# EAGLE board Alice (EAGLE 7.4.0)
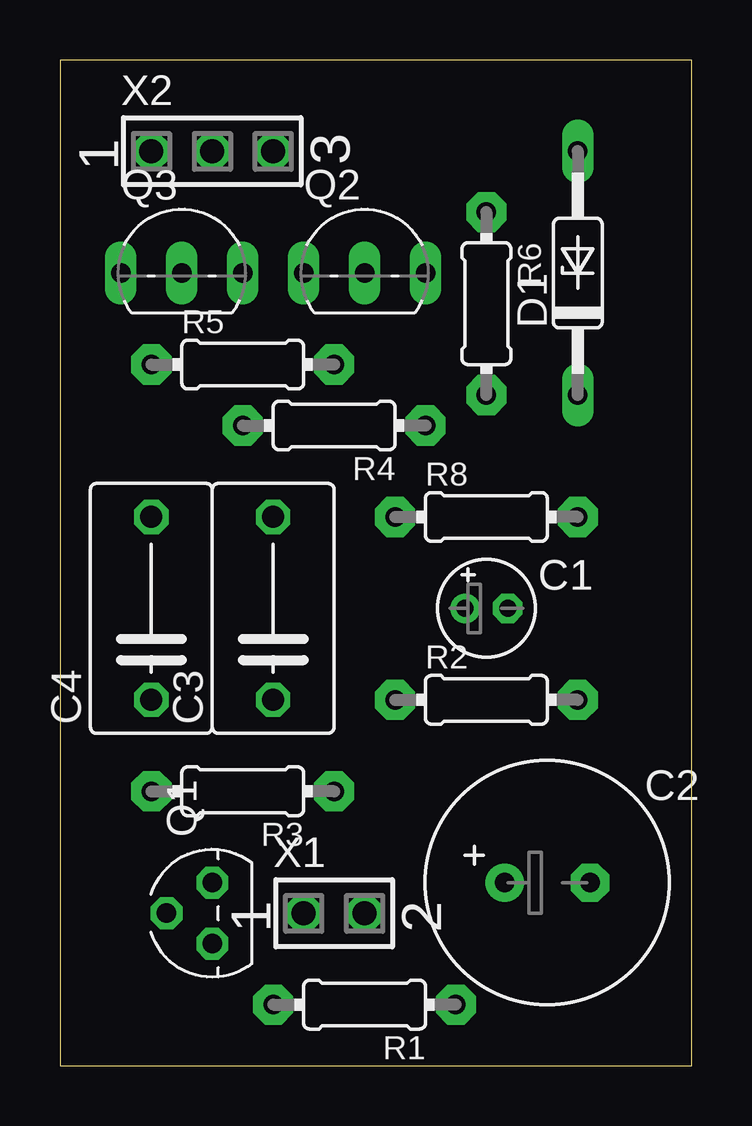
[diagram p0: board, top side]
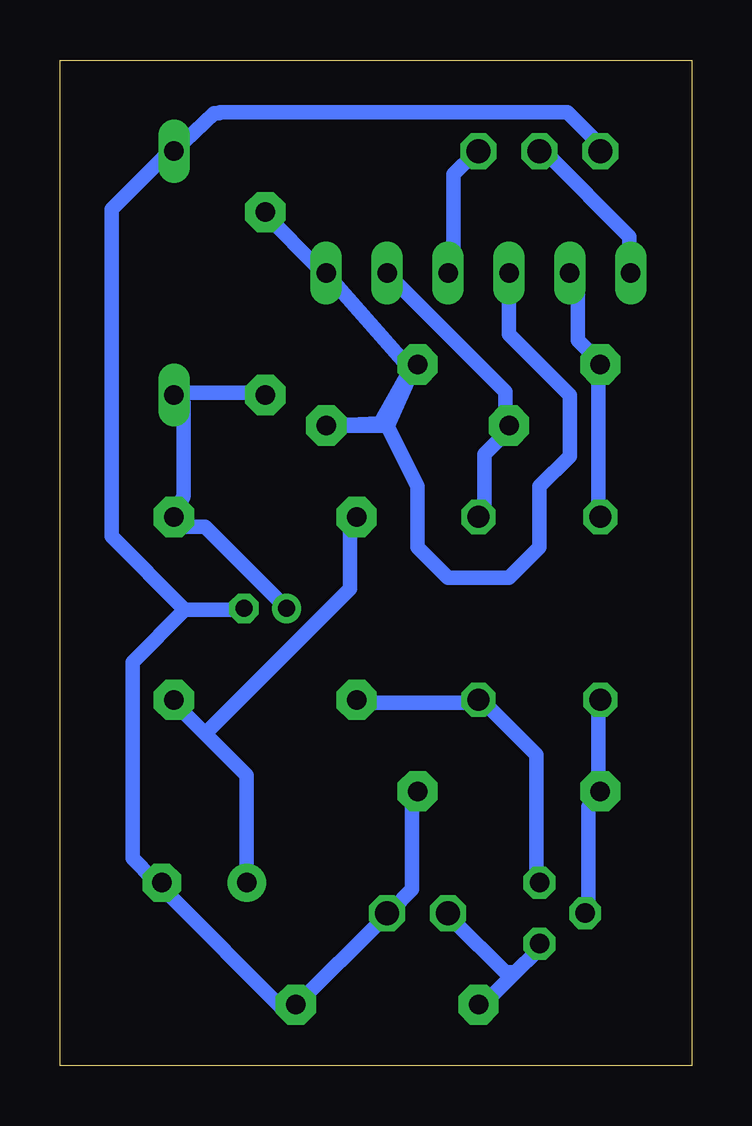
[diagram p1: board, bottom side, seen from below]

Size 26.34 x 41.9 mm. Coordinates in mm from the lower left corner, seen from the top.
Outline: 0,0 26.34,0 26.34,41.9 0,41.9 0,0
Copper layers (1*16): Top 0.035mm / dielectric 1.5mm / Bottom 0.035mm
Design rules "default": minimum track width 10mil, minimum drill 24mil, track to track 8mil, track to pad 8mil, pad to pad 8mil, via to via 8mil, smd to smd 8mil, copper to edge 40mil, drill to drill 8mil, minimum pad ring 10mil, minimum via ring 8mil, stop-mask expansion 4mil, vias tented up to drill 0mil, thermal gap 10mil
Net classes: 0 default: width 0.61 mm, drill 0.508 mm, clearance 0.254 mm

## Footprints (pad centres in the part's own frame; a part is rotated, then mirrored left to right if it is on the bottom)
E1,8-4 = drill 0.711 pad 1.168: + -0.889,0 | drill 0.711 pad 1.168 octagon: - 0.889,0
E3,5-10 = drill 0.813 pad 1.6: + -1.778,0 | drill 0.813 pad 1.6 octagon: - 1.778,0
C075-052X106 = drill 0.914 octagon: 1 -3.81,0; 2 3.81,0
DO35Z10 = drill 0.813 long: A 5.08,0; C -5.08,0
TO-92 = drill 0.813 octagon: 1 -1.27,0; 2 0,1.905; 3 1.27,0
TO92-EBC-OVAL = drill 0.813 long: B 0,-1.27; C 2.54,-1.27; E -2.54,-1.27
0204/7 = drill 0.813 pad 1.676 octagon: 1 -3.81,0; 2 3.81,0
SSW-101-02-S-D = drill 1 pad 1.5 octagon: 1 0,-1.27; 2 0,1.27
SSW-101-02-S-T = drill 1 pad 1.5 octagon: 1 0,-2.54; 2 0,0; 3 0,2.54

## Placement (x,y rotation side)
C1  10uF  [E1,8-4]  17.78,19.05 0 top
C2  68uF  [E3,5-10]  20.32,7.62 0 top
C3  .47uF  [C075-052X106]  8.89,19.05 90 top
C4  .47uF  [C075-052X106]  3.81,19.05 90 top
D1  12V Zener  [DO35Z10]  21.59,33.02 90 top
Q1  J305  [TO-92]  6.35,6.35 90 top
Q2  2N5087  [TO92-EBC-OVAL]  12.7,34.29 0 top
Q3  2N5087  [TO92-EBC-OVAL]  5.08,34.29 0 top
R1  1G  [0204/7]  12.7,2.54 180 top
R2  2K2  [0204/7]  17.78,15.24 0 top
R3  2K2  [0204/7]  7.62,11.43 180 top
R4  100K  [0204/7]  11.43,26.67 180 top
R5  100K  [0204/7]  7.62,29.21 0 top
R6  6K8  [0204/7]  17.78,31.75 270 top
R8  330  [0204/7]  17.78,22.86 0 top
X1  Mic  [SSW-101-02-S-D]  11.43,6.35 270 top
X2  XLR  [SSW-101-02-S-T]  6.35,38.1 270 top

## Library data of the parts
C1-C4 Q2 Q3 R1-R6 R8 = adafruit
D1 = diode
Q1 = transistor-fet
X1 = con-samtec; MPN: SSW-101-02-S-D; OC_FARNELL: unknown; OC_NEWARK: 82P1456
X2 = con-samtec; MPN: SSW-101-02-S-T; OC_FARNELL: unknown; OC_NEWARK: 82P1460

## Nets
N$1: C3.1 Q1.3 R2.1
N$2: Q2.E X2.3
N$3: C2.+ R2.2 R8.1
N$4: C4.1 Q1.2 R3.2
N$5: Q2.C Q3.C R4.1 R5.2 R6.1
N$6: C3.2 Q2.B R4.2
N$7: C4.2 Q3.B R5.1
N$8: Q1.1 R1.2 X1.1
N$9: C1.+ D1.C R6.2 R8.2
N$10: Q3.E X2.2
XLR-1: C1.- C2.- D1.A R1.1 R3.1 X1.2 X2.1

## Tracks (layer width: path | path; a pad name or v marks a point on that pad's centre or on a via)
N$1
  Bottom 0.61: Q1.3 6.48,7.77 6.48,12.95 8.64,15.11 C3.1 9.07,15.11 13.82,15.11 R2.1
N$2
  Bottom 0.61: Q2.E 9.93,33.25 9.93,37.13 9.07,38 X2.3
N$3
  Bottom 0.61: 20.3,13.82 21.59,15.11 R2.2 | 20.3,13.82 18.57,12.09 18.57,7.77 C2.+ | 20.3,13.82 14.25,19.86 14.25,22.45 R8.1
N$4
  Bottom 0.61: Q1.2 4.32,6.48 4.32,10.79 3.89,11.23 R3.2 3.89,11.66 3.89,15.11 C4.1
N$5
  Bottom 0.61: Q3.C 7.62,30.48 5.08,27.94 5.08,25.4 6.35,24.13 6.35,21.59 7.62,20.32 10.16,20.32 11.43,21.59 11.43,24.13 12.68,26.64 | 12.68,26.64 R4.1 13.01,26.77 11.73,29.01 Q2.C 15.54,33.25 15.57,33.25 17.73,35.41 R6.1 18.16,35.84 | 12.68,26.64 11.66,28.93 R5.2
N$6
  Bottom 0.61: Q2.B 12.52,32.82 7.77,28.07 7.77,26.77 R4.2 7.77,26.34 8.64,25.48 8.64,22.89 C3.2
N$7
  Bottom 0.61: Q3.B 4.75,32.82 4.75,30.23 3.89,29.36 R5.1 3.89,28.93 3.89,22.89 C4.2
N$8
  Bottom 0.61: 7.34,3.89 8.64,2.59 R1.2 | 7.34,3.89 6.48,4.75 Q1.1 | 7.34,3.89 7.77,3.89 9.93,6.04 X1.1
N$9
  Bottom 0.61: R6.2 18.16,27.64 17.75,28.04 21.18,28.04 D1.C 21.18,27.61 21.18,23.75 21.59,22.89 R8.2 21.59,22.45 20.3,22.45 C1.+
N$10
  Bottom 0.61: Q3.E 2.59,33.25 2.59,34.54 6.04,38 X2.2
XLR-1
  Bottom 0.61: X2.1 3.89,38.43 5.18,39.73 19.66,39.73 19.71,39.67 19.91,39.67 D1.A 21.61,37.97 21.61,38.25 24.18,35.69 24.18,22.05 21.13,19 | 21.13,19 19,19 C1.- | 21.13,19 23.32,16.82 23.32,8.64 22.45,7.77 C2.- 22.02,7.34 16.84,2.16 R1.1 16.41,2.59 12.95,6.04 X1.2 12.52,6.48 11.66,7.34 11.66,11.23 R3.1